# Altium PCB PCB1.PcbDoc
Units mm, origin at the board's own origin, x right, y up, seen from the top; angles counter-clockwise.
Board outline 152.4 x 101.6 mm, 2 copper layers (Top Layer, Bottom Layer); 23 components, 18 nets, 93 pads, 63 vias.
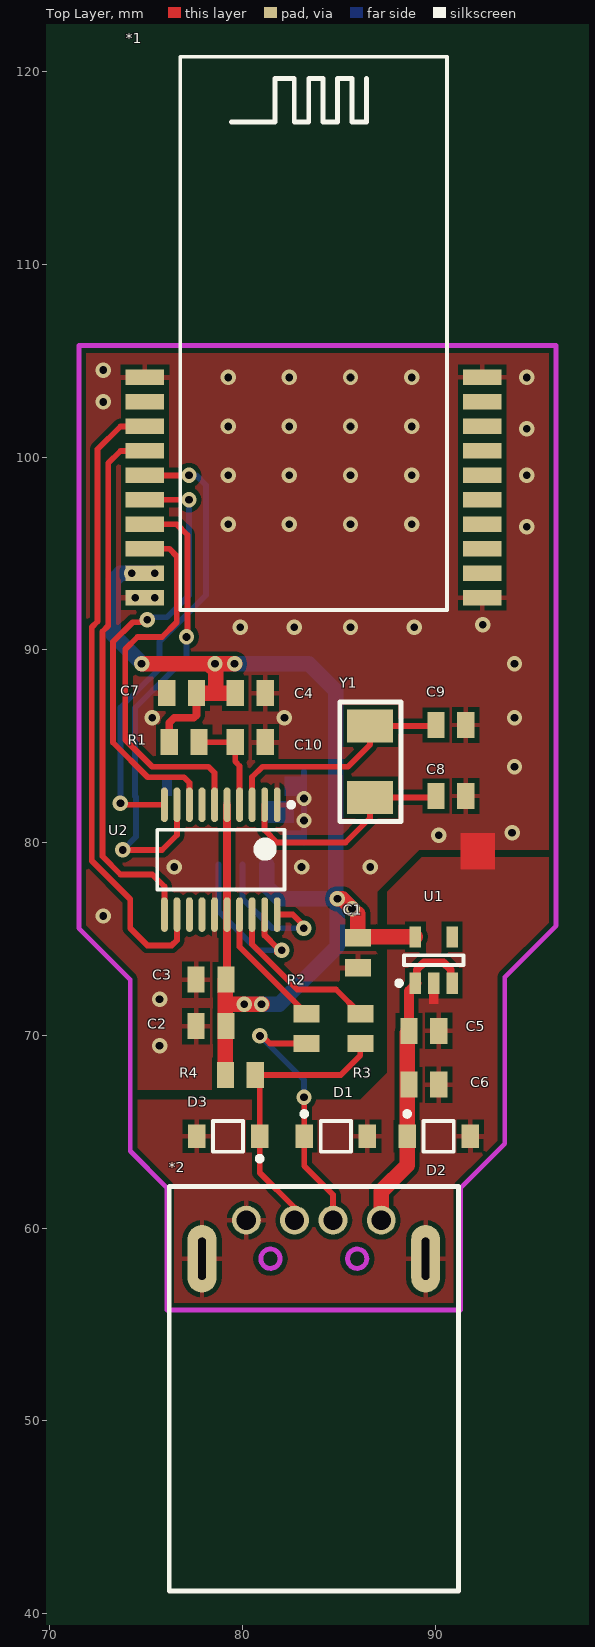
[diagram p0: Top Layer view]
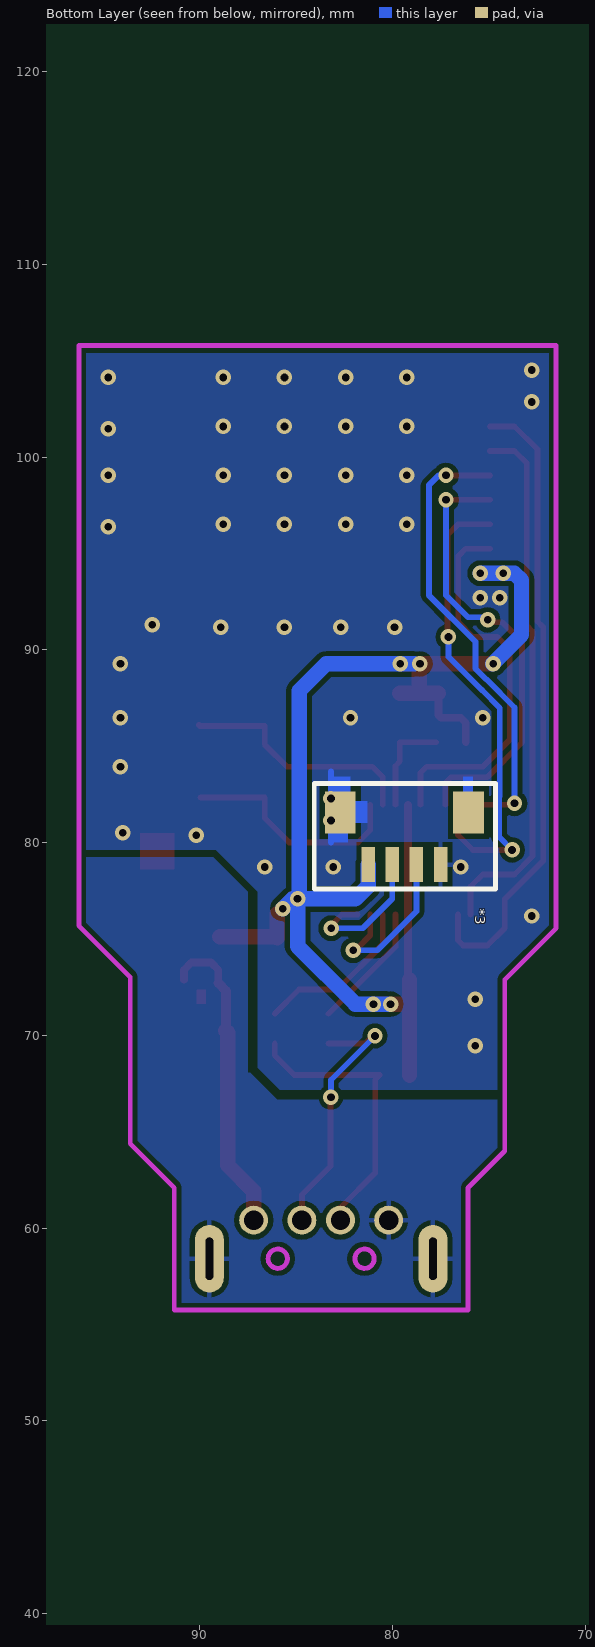
[diagram p1: Bottom Layer view, seen from below]

## Layer stack, top to bottom
Top Solder: solder mask 0.0102, Solder Resist, Dk 3.5
Top Layer: signal copper 0.0356
Dielectric 1: dielectric 0.32, FR-4, Dk 4.8
Bottom Layer: signal copper 0.0356
Bottom Solder: solder mask 0.0102, Solder Resist, Dk 3.5

## Board outline
25.4,25.4 177.8,25.4 177.8,127 25.4,127

## Design rules (kind name [scope] priority, off if disabled: settings)
Clearance [All] p1: gap=0.254
PolygonConnect [All] p1: connectstyle=Relief reliefconductorwidth=0.254 reliefentries=4 polygonreliefangle="90 Angle" airgapwidth=0.254
RoutingVias [All] p1: holewidth=0.711 width=1.27 viastyle="Through Hole" minholewidth=0.711 minwidth=1.27 maxholewidth=0.711 maxwidth=1.27
SolderMaskExpansion [All] p1: expansion=0.102
Width Width_2 [InNet('Net*2_1')] p1: maxlimit=0.8 minlimit=0.4 preferedwidth=0.8
Width Width_1 [InNet('VCC')] p2: maxlimit=0.8 minlimit=0.4 preferedwidth=0.8
Width [All] p3: maxlimit=0.3 minlimit=0.3 preferedwidth=0.3
29 further rules are at their usual default settings.

## Components (designator, comment, footprint, x,y, rotation, side; value= is the part's Value field where it differs from the comment)
*1 "Wireless" Wireless 74.93,104.14 r0 top
*2 "USB" DIP10 83.693,58.42 r90 top
*3 "Plugin4P" PLUGIN4P 79.375,78.867 r0 bottom
C1 "0.1uf" RESC2013X65X40LL15T20 85.979,74.295 r90 top
C2 "0.1uf" RESC2013X65X40LL15T20 78.359,70.485 r0 top
C3 "10uf" RESC2013X65X40LL15T20 78.359,72.898 r0 top
C4 "10uf" RESC2013X65X40LL15T20 80.391,87.757 r180 top
C5 "10uf" RESC2013X65X40LL15T20 89.408,70.244 r0 top
C6 "10uf" RESC2013X65X40LL15T20 89.408,67.45 r180 top
C7 "10uf" RESC2013X65X40LL15T20 76.835,87.757 r0 top
C8 "22pf" RESC2013X65X40LL15T20 90.805,82.423 r0 top
C9 "22pf" RESC2013X65X40LL15T20 90.805,86.106 r0 top
C10 "0.1uf" RESC2013X65X40LL15T20 80.391,85.217 r180 top
D1 "PTVSHC1DF7VB" ONSC-SOD-123-2-425-04_V 84.836,64.77 r0 top
D2 "PTVSHC1DF7VB" ONSC-SOD-123-2-425-04_V 90.17,64.77 r0 top
D3 "PTVSHC1DF7VB" ONSC-SOD-123-2-425-04_V 79.248,64.77 r180 top
R1 "10k" RESC2013X65X40LL15T20 76.962,85.217 r0 top
R2 "22" RESC2013X65X40LL15T20 83.312,70.358 r90 top
R3 "22" RESC2013X65X40LL15T20 86.106,70.358 r90 top
R4 "1.5k" RESC2013X65X40LL15T20 79.883,67.945 r0 top
U1 "TLV70233DBVR" TI-DBV5_N 89.916,73.914 r90 top
U2 "STM32F070F6P6" STM-TSSOP20_N 78.867,79.121 r270 top
Y1 "8mhz" XTAL 86.614,84.201 r270 top

## Footprints (in the part's own frame and the unit in brackets; to place one, negate y for a bottom-side part, rotate by r counter-clockwise, add the part's x,y. Pads: shape width x height; smd on the part's side, far side on the other; paste and mask are expansions set on the pad)
DIP10 [mm]
  round 1.5 hole 1: 1(2,-3.5) 2(2,-1) 3(2,1) 4(2,3.5)
  oval 3.5x1.5 hole 0.4 slot 2.2 at 0 deg: 4(0,5.8) 4(0,-5.8)
  Keep-Out Layer circle w0.254: c0,-2.25 r0.5
  Keep-Out Layer circle w0.254: c0,2.25 r0.5
  silkscreen extent -17.25,-7.5 3.75,7.5
ONSC-SOD-123-2-425-04_V [mm] "SOD, 2-Leads, Body 2.69x1.6mm"
  rect 0.91x1.22 smd: 1(-1.635,0) 2(1.635,0)
  silkscreen extent -1.76,-0.8 0.78,1.28, body extent -1.35,-0.8 1.35,0.8, height 1.35
PLUGIN4P [mm]
  rect 0.7x1.8 smd: 1(-1.875,0) 2(-0.625,0) 3(0.625,0) 4(1.875,0)
  rect 1.6x2.2 smd: ""(-3.325,-2.7) ""(3.325,-2.7)
  silkscreen extent -4.72,-4.2 4.67,1.28
RESC2013X65X40LL15T20 [mm] "Chip Resistor, 2-Leads, Body 2.00x1.3 mm, IPC High Density"
  rect 0.9x1.35 smd: 1(-0.775,0) 2(0.775,0)
  body extent -1.07,-0.72 1.07,0.72, height 0.65
STM-TSSOP20_N [mm] "SOP, 20-Leads, Body 6.6x4.5mm, Pitch 0.65mm, IPC Medium Density"
  oval 1.8x0.35 smd: 1(-2.85,2.925) 2(-2.85,2.275) 3(-2.85,1.625) 4(-2.85,0.975) 5(-2.85,0.325) 6(-2.85,-0.325) 7(-2.85,-0.975) 8(-2.85,-1.625) 9(-2.85,-2.275) 10(-2.85,-2.925) 11(2.85,-2.925) 12(2.85,-2.275) 13(2.85,-1.625) 14(2.85,-0.975) 15(2.85,-0.325) 16(2.85,0.325) 17(2.85,0.975) 18(2.85,1.625) 19(2.85,2.275) 20(2.85,2.925)
  silkscreen extent -2.97,-3.3 1.55,3.78, body extent -2.25,-3.3 2.25,3.3, height 1.2
TI-DBV5_N [mm] "SOT23, 5-Leads, Body 2.9x1.6mm, Pitch 0.95mm, IPC Medium Density"
  rect 1.1x0.6 smd: 1(-1.2,0.95) 2(-1.2,0) 3(-1.2,-0.95) 4(1.2,-0.95) 5(1.2,0.95)
  silkscreen extent -1.32,-1.55 0.25,1.92, body extent -0.87,-1.52 0.87,1.53, height 1.45
Wireless [mm]
  rect 2x0.8 smd: 1(0,0) 2(0,-1.27) 3(0,-2.54) 4(0,-3.81) 5(0,-5.08) 6(0,-6.35) 7(0,-7.62) 8(0,-8.89) 9(0,-10.16) 10(0,-11.43) 11(17.5,-11.43) 12(17.5,-10.16) 13(17.5,-8.89) 14(17.5,-7.62) 15(17.5,-6.35) 16(17.5,-5.08) 17(17.5,-3.81) 18(17.5,-2.54) 19(17.5,-1.27) 20(17.5,0)
  silkscreen extent 1.84,-12.06 15.67,16.64
XTAL [mm]
  rect 1.7x2.4 smd: 1(-1.85,0) 2(1.85,0)
  silkscreen extent -3.1,-1.58 3.1,1.6

## Part data
C1 C2 C3 C4 C5 C6 C7 C8 C9 C10: library part Cap, "Capacitor"
D1 D2 D3: library part MMSZ39T1G, "Zener Voltage Regulator, 500 mW, 2-Pin SOD-123, Pb-Free, Tape and Reel"
R1 R2 R3 R4: library part Res3, "Resistor"
U1: "Single Output LDO, 300 mA, Fixed 3.3 V Output, 2 to 5.5 V Input, with Low IQ, 5-pin SOT-23 (DBV), -40 to 125 degC, Green (RoHS & no Sb/Br)"
U2: library part STM32F050F6P6, "ARM Cortex-M0 32-bit MCU, 32 KB Flash, 4 KB Internal RAM, 15 I/Os, 20-pin TSSOP, -40 to 85 degC, Tube"
Y1: library part XTAL, "Crystal Oscillator"

## Via types
v1: diameter 0.8, hole 0.4, Top Layer to Bottom Layer, 63 vias

## Nets (pads, with @x,y where several pads share a name; then routed paths per layer and width w, separated by ;. In a path a pad name is that pad's centre, name@x,y a point inside that pad or via, vN(x,y) a via of type N, cw(c..) or ccw(c..) an arc to the next point about the centre after c; other vN are vias at no path point)
GND: *1.1 *1.10 *1.11 *1.20 *2.4 *3. *3.1 C1.1 C2.1 C3.1 C4.1 C5.2 C6.1 C7.1 C8.2 C9.2 C10.1 D1.2 D2.2 D3.2 U1.2 U2.1 U2.15 | length 3.7
  Bottom Layer w0.3: 83.185,80.01 v1(83.185,81.153) 83.185,83.693
  other v1: 75.692,69.469 75.692,71.882 72.771,76.2 76.454,78.74 83.058,78.74 86.614,78.74 90.17,80.391 93.98,80.518 83.185,82.296 94.107,83.947 75.311,86.487 82.169,86.487 94.107,86.487 94.107,89.281 79.883,91.186 82.677,91.186 85.598,91.186 88.9,91.186 92.456,91.313 74.422,92.71 75.438,92.71 94.742,96.393 79.248,96.52 82.423,96.52 85.598,96.52 88.773,96.52 79.248,99.06 82.423,99.06 85.598,99.06 88.773,99.06 94.742,99.06 94.742,101.473 79.248,101.6 82.423,101.6 85.598,101.6 88.773,101.6 72.771,102.87 79.248,104.14 82.423,104.14 85.598,104.14 88.773,104.14 94.742,104.14 72.771,104.521
Net*1_3: *1.3 U2.12 | length 33
  Top Layer w0.3: *1.3 73.66,101.6 72.471,100.411 72.471,91.483 72.171,91.183 72.171,79.065 74.168,77.068 74.168,75.565 75.057,74.676 76.327,74.676 76.592,74.941 U2.12
Net*1_4: *1.4 U2.11 | length 28
  Top Layer w0.3: *1.4 73.66,100.33 73.025,99.695 73.025,91.253 72.725,90.953 72.725,79.294 73.66,78.359 75.311,78.359 75.942,77.728 U2.11
Net*1_5: *1.5 U2.10 | length 24.1
  Top Layer w0.3: v1(73.66,82.042) 73.731,81.971 U2.10 ; *1.5 v1(77.216,99.06)
  Bottom Layer w0.3: v1(73.66,82.042) 73.66,87.016 75.121,88.477 75.136,88.477 75.692,89.033 75.692,90.424 78.105,92.837 78.105,98.552 77.597,99.06 v1(77.216,99.06)
Net*1_6: *1.6 U2.8 | length 23.5
  Top Layer w0.3: *1.6 v1(77.216,97.79) ; v1@75.057,91.694 75.057,91.44 74.295,91.44 73.279,90.424 73.279,85.196 75.082,83.393 76.962,83.393 77.242,83.113 U2.8
  Bottom Layer w0.3: v1@75.057,91.694 76.073,91.694 77.216,92.837 v1(77.216,97.79)
  other v1: 75.057,91.567
Net*1_7: *1.7 U2.9 | length 24.9
  Top Layer w0.3: v1(73.787,79.629) 75.819,79.629 76.592,80.402 U2.9 ; *1.7 76.581,96.52 77.135,95.966 v1@77.135,90.678
  Bottom Layer w0.3: v1(73.787,79.629) 74.464,80.306 74.464,82.375 74.422,82.417 74.422,86.995 75.35,87.923 75.366,87.923 77.089,89.647 v1(77.089,90.678)
Net*1_8: *1.8 U2.6 | length 20.2
  Top Layer w0.3: *1.8 76.2,95.25 76.581,94.869 76.581,91.44 75.819,90.678 74.549,90.678 73.914,90.043 73.914,85.344 75.311,83.947 78.232,83.947 78.542,83.637 U2.6
Net*2_1: *2.1 C5.1 C6.2 D2.1 U1.1 U1.3 | length 16.3
  Top Layer w0.4: U1.1@89.027,72.714 89.027,73.406 89.408,73.787 90.424,73.787 90.805,73.406 U1.3@90.805,72.898
  Top Layer w0.5: C5.1 88.633,72.32 U1.1@89.027,72.714
  Top Layer w0.8: *2.1 87.193,61.92 88.535,63.262 D2.1 88.535,70.146 C5.1
Net*2_2: *2.2 D1.1 R2.1 | length 13.7
  Top Layer w0.3: v1(80.899,69.977) 81.026,69.977 81.42,69.583 R2.1 ; v1(83.185,66.802) 83.201,66.786 D1.1 83.201,63.23 84.693,61.738 *2.2
  Bottom Layer w0.3: v1(80.899,69.977) 83.185,67.691 v1(83.185,66.802)
Net*2_3: *2.3 D3.1 R3.1 R4.2 | length 14.9
  Top Layer w0.3: *2.3 82.693,61.071 80.883,62.881 D3.1 80.883,67.72 R4.2 85.09,67.945 86.106,68.961 R3.1
Net*3_2: *3.2 U2.19 | length 8.8
  Top Layer w0.3: U2.19 81.142,75.195 81.788,74.549 v1@81.788,74.295
  Bottom Layer w0.3: *3.2 78.75,76.444 80.772,74.422 v1(82.026,74.422)
Net*3_3: *3.3 U2.20 | length 7.2
  Top Layer w0.3: U2.20 82.606,76.271 v1@83.185,75.692
  Bottom Layer w0.3: *3.3 80,77.099 81.534,75.565 v1(83.169,75.565)
NetC8_1: C8.1 U2.2 Y1.2 | length 12
  Top Layer w0.3: U2.2 81.142,80.656 81.788,80.01 85.344,80.01 86.614,81.28 Y1.2 C8.1@89.958,82.351
NetC9_1: C9.1 U2.3 Y1.1 | length 12.7
  Top Layer w0.3: U2.3 80.492,83.413 81.026,83.947 85.471,83.947 86.614,85.09 Y1.1 89.975,86.051 C9.1
NetC10_2: C10.2 R1.2 U2.4 | length 5.2
  Top Layer w0.3: R1.2 C10.2 79.616,84.214 79.842,83.988 U2.4
NetR2_2: R2.2 U2.17 | length 6.6
  Top Layer w0.3: U2.17 79.842,74.603 R2.2
NetR3_2: R3.2 U2.18 | length 8.6
  Top Layer w0.3: U2.18 80.492,74.736 82.838,72.39 84.849,72.39 R3.2
VCC: *1.9 *3.4 C1.2 C2.2 C3.2 C4.2 C7.2 R1.1 R4.1 U1.5 U2.5 U2.16 | length 72.3
  Top Layer w0.4: R1.1 76.187,86.22 76.454,86.487 77.47,86.487 77.61,86.627 C7.2 ; C3.2@79.108,72.898 79.192,72.982 U2.5
  Top Layer w0.8: v1@74.803,89.281 v1@78.232,89.281 ; C7.2 78.567,87.757 ; R4.1 79.108,71.628 ; C3.2@79.108,72.898 79.108,71.628 ; v1(79.583,89.281) v1@78.232,89.281 ; C4.2 78.567,87.757 ; v1@81.026,71.628 v1(80.98,71.628) v1(80.091,71.628) 79.108,71.628 ; v1(84.917,77.089) 85.171,77.089 v1(85.679,76.581) ; v1@85.979,76.327 C1.2 86.023,75.114 U1.5 ; v1@78.232,89.281 78.613,88.9 78.613,87.803 78.567,87.757
  Bottom Layer w0.8: v1@74.803,89.281 73.298,90.786 73.298,93.618 73.66,93.98 v1(75.438,93.98) ; v1@78.867,89.281 83.439,89.281 84.836,87.884 84.836,77.089 81.915,77.089 81.25,77.754 *3.4 ; v1@80.264,71.628 81.915,71.628 84.917,74.63 v1(84.917,77.089) 85.171,77.089 v1(85.679,76.581)
  other v1: 74.757,89.281 78.567,89.281 74.249,93.98
pads on no net: *1.2 *1.12 *1.13 *1.14 *1.15 *1.16 *1.17 *1.18 *1.19 U1.4 U2.7 U2.13 U2.14

## Polygon pours and split planes (outlines as drawn)
GND on Top Layer "Bottom Layer-No Net" (solid, remove dead copper, pour order 4): 76.073,55.753 91.313,55.753 91.313,62.103 93.599,64.389 93.599,73.025 96.266,75.692 96.266,79.248 89.281,79.248 87.503,77.47 87.503,68.072 86.106,66.675 74.168,66.675 74.168,64.008 76.073,62.103 76.073,55.753
GND on Top Layer "Bottom Layer-No Net" (solid, remove dead copper, pour order 8): 96.266,79.629 89.281,79.629 89.154,79.629 86.995,77.47 86.995,68.199 86.995,68.072 86.106,67.183 74.168,67.183 74.168,72.898 71.501,75.565 71.501,105.791 96.266,105.791 96.266,79.629
GND on Bottom Layer "Bottom Layer-No Net" (solid, remove dead copper, pour order 6): 76.073,55.753 91.313,55.753 91.313,62.103 93.599,64.389 93.599,73.025 96.266,75.692 96.266,79.248 89.281,79.248 87.503,77.47 87.503,68.072 87.376,68.072 85.979,66.675 74.168,66.675 74.168,64.008 76.073,62.103 76.073,55.753
GND on Bottom Layer "Bottom Layer-No Net" (solid, remove dead copper, pour order 10): 96.266,79.629 89.154,79.629 86.995,77.47 86.995,68.453 86.995,68.326 85.852,67.183 74.168,67.183 74.168,72.898 71.501,75.565 71.501,105.791 96.266,105.791

## Keep-outs
Keep-Out Layer:
  lines w0.254: 71.501,75.565 74.168,72.898 74.168,64.008 76.073,62.103 76.073,55.753 91.313,55.753 91.313,62.103 93.599,64.389 93.599,73.025 96.266,75.692 96.266,105.791 71.501,105.791 71.501,98.298 71.501,75.565

## Other copper
Top Layer:
  rectangle net GND: 91.313,78.613 93.091,80.518
  rectangle net GND: 89.662,71.628 90.17,72.39
Bottom Layer:
  rectangle net GND: 81.28,81.026 82.677,82.169
  rectangle net GND: 82.169,82.423 83.185,83.439
  rectangle net GND: 82.296,80.01 83.185,80.645
  rectangle net GND: 75.819,82.423 76.327,83.439